# Allegro board avrusb500.brd
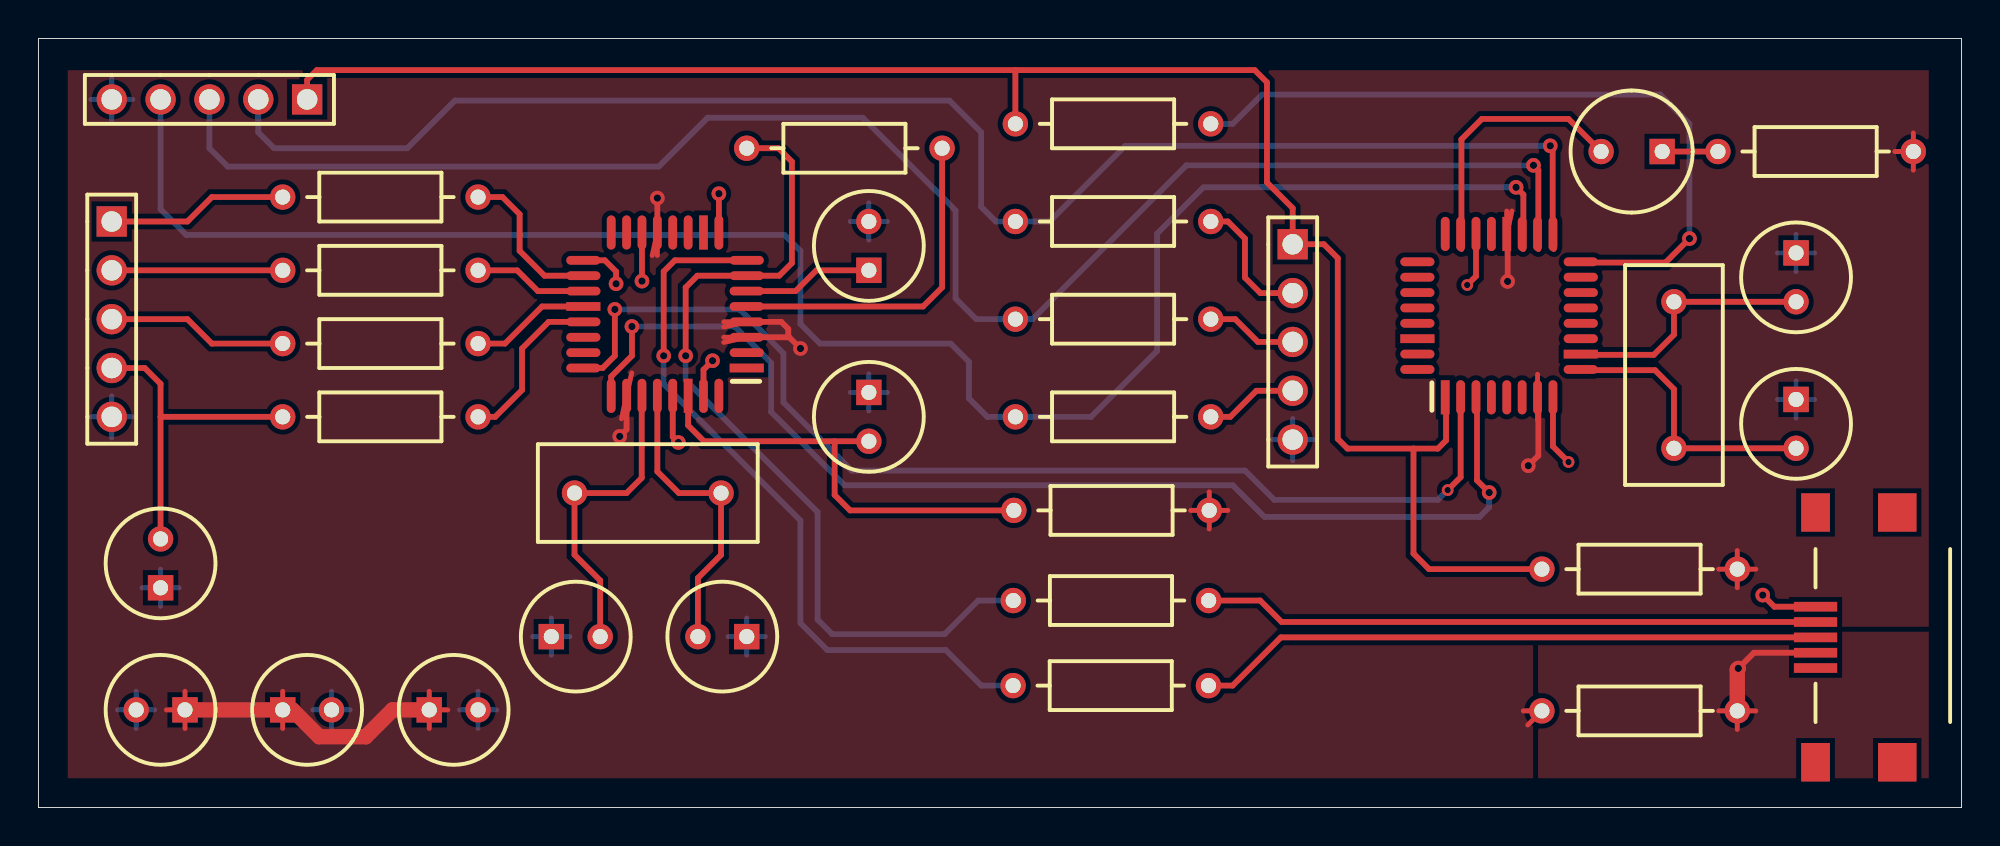
[diagram p0: board, top side]
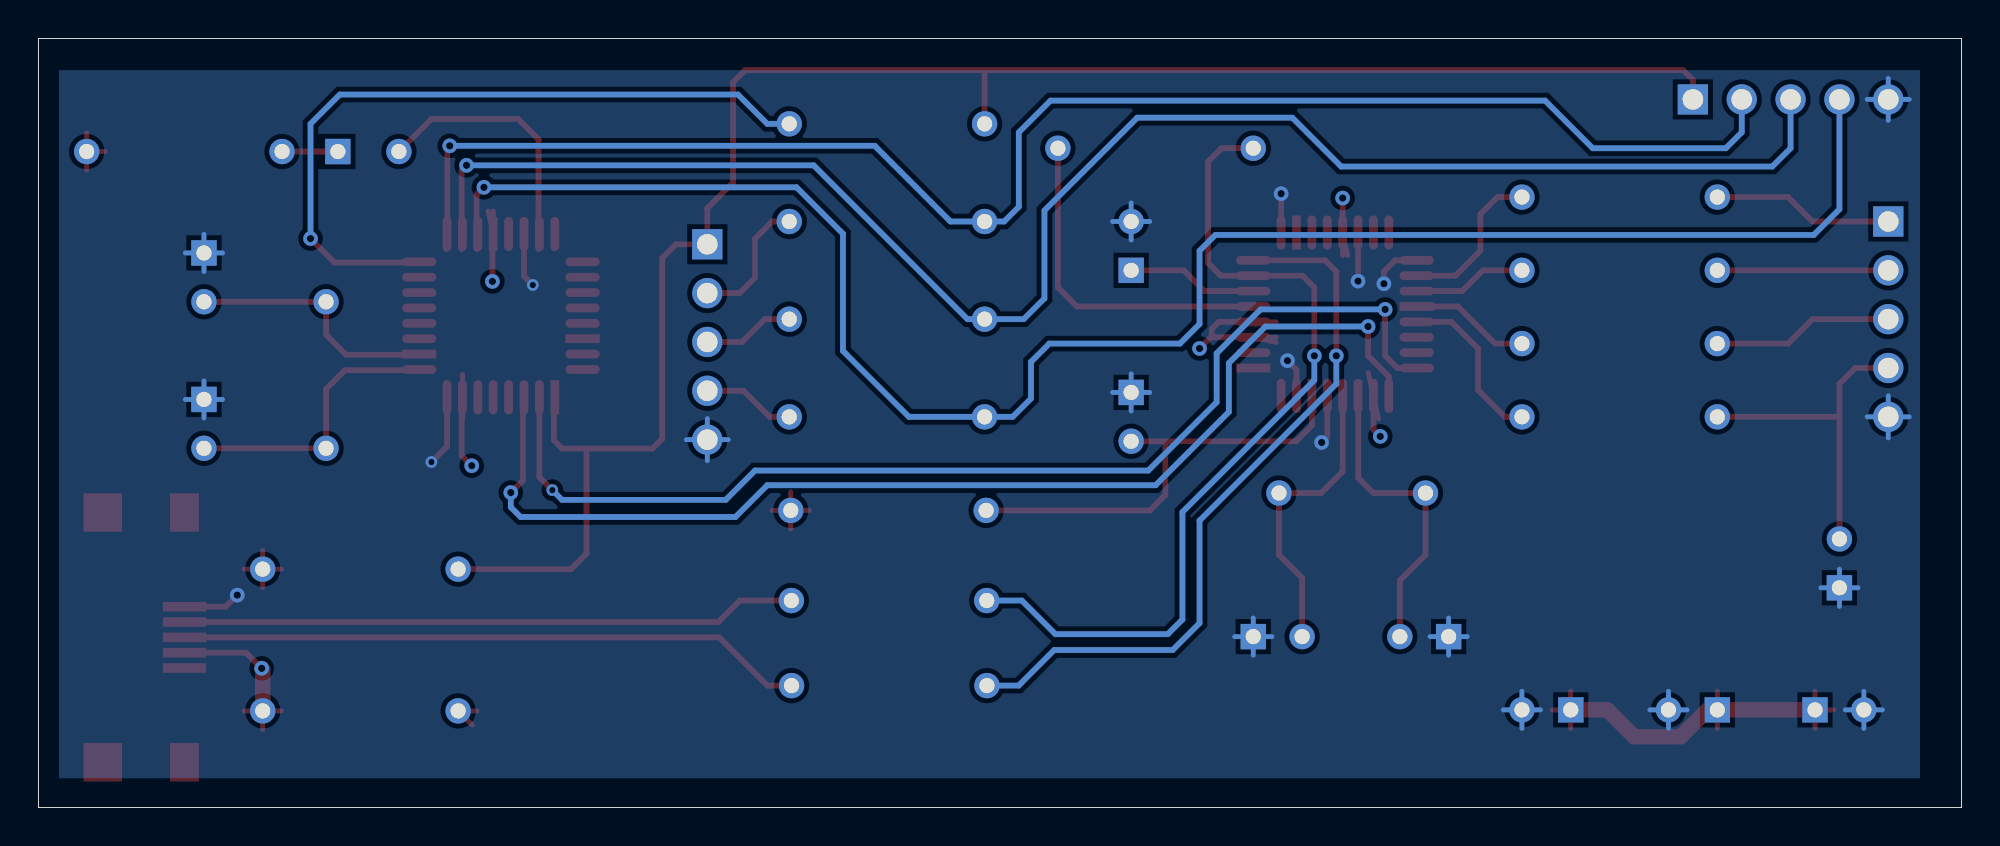
[diagram p1: board, bottom side, seen from below]

Outline 100 x 40 mm; copper layers: TOP, GND, POWER, BOTTOM. Coordinates in mm from the lower left corner of the outline.
Outline path: 0,40 0,0 100,0 100,40 0,40

## Design rules (mm)
net group NO_TYPE: nets +5V BMISO BMOSI BRESET BSCK D+ D- F_MISO F_MOSI F_SCK GND MISO MOSI N02483 N02615 N03527 N06839 N06967 N07033 N07247 N11951 N15182 N15289 N19734 N20572 N22544 N41098 N41106 N49165 RESET RXD SCK TXD VCC

## Placement (name value [footprint] x y rotation side)
C1  47nF  [CPCYL1D225LS100031]  43.18 21.59 270 top
C2  27pF  [CPCYL1D225LS100031]  36.83 8.89 180 top
C3  27pF  [CPCYL1D225LS100031]  26.67 8.89 0 top
C4  47nF  [CPCYL1D225LS100031]  43.18 27.94 90 top
C5  100nF  [CPCYL1D225LS100031]  12.7 5.08 0 top
C6  1uF  [CPCYL1D225LS100031]  7.62 5.08 180 top
C7  100nF  [CPCYL1D225LS100031]  91.39 21.23 270 top
C8  100nF  [CPCYL1D225LS100031]  91.39 28.84 270 top
C9  100nF  [CPCYL1D225LS100031]  20.32 5.08 0 top
C10  22nF  [CPCYL1D225LS100031]  6.35 11.43 90 top
D1  LED  [CYLD250LS125031]  84.43 34.12 180 top
IC1  ATmega8  [QUAD80M32WG900]  73.15 21.34 0 top
J1  bbpg_Bitbang  [BLKCON100VHTM1SQSW1005]  3.81 30.48 270 top
J2  USBA  [USBMINIB]  92.41 10.45 270 top
J3  avrusb500_out  [BLKCON100VHTM1SQSW1005]  65.22 29.3 270 top
J4  firmware_in  [BLKCON100VHTM1SQSW1005]  13.97 36.83 180 top
R1  470  [AX400X100031]  50.72 15.45 0 top
R2  220  [AX400X100031]  22.86 20.32 180 top
R3  220  [AX400X100031]  22.86 24.13 180 top
R4  220  [AX400X100031]  22.86 27.94 180 top
R5  27  [AX400X100031]  60.84 6.34 180 top
R6  27  [AX400X100031]  60.85 10.77 180 top
R7  1.5k  [AX400X100031]  36.83 34.29 0 top
R8  2.2  [AX400X100031]  88.34 5.03 180 top
R9  10k  [AX400X100031]  88.34 12.4 180 top
R10  470  [AX400X100031]  87.33 34.12 0 top
R11  1k  [AX400X100031]  50.8 20.32 0 top
R12  220  [AX400X100031]  50.8 25.4 0 top
R13  1k  [AX400X100031]  50.8 30.48 0 top
R14  220  [AX400X100031]  22.86 31.75 180 top
R15  220  [AX400X100031]  60.96 35.56 180 top
U1  FT232BM  [QUAD80M32WG900]  36.83 22.86 90 top
Y1  3.6864Mhz  [RAD450X200LS300031]  85.05 26.3 270 top
Y2  6Mhz  [RAD450X200LS300031]  35.49 16.36 180 top

## Library data of the parts
C1-C5 C7-C10 = CAPACITOR NON-POL: alternate symbols: (SMDCAP)
C6 = CAPACITOR POL: alternate symbols: (SMDCAP)
D1 = LED
IC1 = ATmega8-DIL28_1
J1 J3 J4 = CON5
J2 = CON4_6
R1-R15 = R: alternate symbols: (SMDRES)
U1 = FT232BM_2: alternate symbols: (JEDECMS026)
Y1 Y2 = ZTA

## Footprints (pads in the part's own frame, mm; a bottom-side part is the same pattern mirrored in y, then rotated)
AX400X100031
  round 1.321 hole 0.787: 1(0,0) 2(10.16,0)
BLKCON100VHTM1SQSW1005
  rect 1.575x1.575 hole 1.067: 1(0,0)
  round 1.575 hole 1.067: 2(2.54,0) 3(5.08,0) 4(7.62,0) 5(10.16,0)
CPCYL1D225LS100031
  rect 1.321x1.321 hole 0.787: 1(0,0)
  round 1.321 hole 0.787: 2(2.54,0)
CYLD250LS125031
  rect 1.321x1.321 hole 0.787: 1(0,0)
  round 1.321 hole 0.787: 2(3.175,0)
QUAD80M32WG900
  rect 0.457x1.778 smd: 1(0,0) 20(3.2,8.496)
  oval 0.457x1.778 smd: 2(0.8,0) 3(1.6,0) 4(2.4,0) 5(3.2,0) 6(4,0) 7(4.801,0) 8(5.601,0) 17(5.601,8.496) 18(4.801,8.496) 19(4,8.496) 21(2.4,8.496) 22(1.6,8.496) 23(0.8,8.496) 24(0,8.496)
  oval 1.778x0.457 smd: 9(7.048,1.448) 11(7.048,3.048) 12(7.048,3.848) 13(7.048,4.648) 14(7.048,5.448) 15(7.048,6.248) 16(7.048,7.048) 25(-1.448,7.048) 26(-1.448,6.248) 27(-1.448,5.448) 28(-1.448,4.648) 29(-1.448,3.848) 31(-1.448,2.248) 32(-1.448,1.448)
  rect 1.778x0.457 smd: 10(7.048,2.248) 30(-1.448,3.048)
RAD450X200LS300031
  round 1.321 hole 0.787: 1(0,0) 2(7.62,0)
USBMINIB
  rect 0.5x2.25 smd: 1(0,0) 2(0.798,0) 3(1.595,0) 4(2.393,0) 5(3.19,0)
  rect 2x1.5 smd: SHIELD1(-4.9,0) SHIELD2(8.09,0)
  rect 2x2 smd: SHIELD3(-4.9,4.25) SHIELD4(8.09,4.25)

## Nets
+5V: J2.4 R8.1
GND: C1.1 C2.1 C3.1 C4.2 C5.2 C6.2 C7.1 C8.1 C9.2 C10.1 IC1.8(GND) IC1.22(AGND) J1.5 J2.1 J3.5 J4.5 U1.9(GND) U1.14(PWRCTL) U1.17(GND1) U1.29(AGND) U1.31(TEST)
VCC: C5.1 C6.1 C9.1 IC1.7(VCC) IC1.20(AVCC) R1.2 R8.2 R9.1 R10.2 U1.3(VCC) U1.4(RESET#) U1.13(VCC-IO) U1.26(VCC1)
BMISO: J1.3 R3.2
BMOSI: J1.2 R4.2
BRESET: J1.1 R14.2
BSCK: C10.2 J1.4 R2.2
D+: J2.2 R6.1
D-: J2.3 R5.1
F_MISO: IC1.18((MISO) PB4) J4.3 R12.1
F_MOSI: IC1.17((OC2/MOSI) PB3) J4.2 R13.1
F_SCK: IC1.19((SCK) PB5) J4.4 R11.1
MISO: J3.3 R12.2
MOSI: J3.2 R13.2
RESET: IC1.1(PC6 (R\E\S\E\T\)) J3.1 J4.1 R9.2 R15.2
RXD: IC1.2(PD0 (RXD)) U1.24(RXD)
SCK: J3.4 R11.2
TXD: IC1.3(PD1 (TXD)) U1.25(TXD)
N02483: R6.2 R7.1 U1.7(USBDP)
N02615: R5.2 U1.8(USBDM)
N03527: C4.1 U1.6(3V3OUT)
N06839: R2.1 U1.21(DTR#)
N06967: R3.1 U1.20(DSR#)
N07033: R4.1 U1.19(DCD#)
N07247: R14.1 U1.18(RI#)
N11951: R7.2 U1.5(RSTOUT#)
N15182: C7.2 IC1.9(PB6 (XT1/TOSC1)) Y1.2
N15289: C8.2 IC1.10(PB7 (XT2/TOSC2)) Y1.1
N19734: D1.2(CATHODE) IC1.23((ADC0) PC0)
N20572: D1.1(ANODE) R10.1
N22544: IC1.16((SS/OC1B) PB2) R15.1
N41098: C3.2 U1.27(XTIN) Y2.2
N41106: C2.2 U1.28(XTOUT) Y2.1
N49165: C1.2 R1.1 U1.30(AVCC)

Pads without a net: IC1 4 5 6 11 12 13 14 15 21 24 25 26 27 28 29 30 31 32; J2 5 SHIELD1 SHIELD2 SHIELD3 SHIELD4; U1 1 2 10 11 12 15 16 22 23 32

## Via types
v1: diameter 0.762, hole 0.381, TOP to BOTTOM, 21 vias
v2: diameter 0.61, hole 0.33, TOP to BOTTOM, 3 vias

## Routing (per net, layer and track width the routed paths; a pad name or vN(x,y) marks a point on that pad's centre or on a via; arc(x,y) is an arc through that point)
+5V: length 9.5
  TOP w0.254: 88.34,4.06 R8.1 ; R8.1 87.37,5.03 ; R8.1 89.3,5.03
  TOP w0.3: v1(88.39,7.24) 89.21,8.05 J2.4
  TOP w0.8: v1(88.39,7.24) 88.34,7.18 R8.1
GND: length 73
  TOP w0.3: U1.17 29.45,28.46 30.04,27.88 v1(30.04,27.24) ; U1.29 32.98,19.28 v1(33.27,18.99) ; IC1.8 78.75,18.78 v2(79.56,17.97) ; v1(89.66,11.05) 90.27,10.45 J2.1 ; v1(35.05,23.24) 34.58,22.77 U1.31 ; IC1.22 74.75,27.64 v2(74.3,27.18) ; v1(35.38,31.93) U1.9 ; U1.14 v1(31.38,27.38)
  BOTTOM w0.254: 21.89,5.08 C9.2 ; C9.2 22.86,4.11 ; C9.2 23.83,5.08 ; C9.2 22.86,6.05 ; 25.7,8.89 C3.1 ; C3.1 26.67,7.92 ; C3.1 26.67,9.86 ; C3.1 27.64,8.89 ; C1.1 44.15,21.59 ; C1.1 43.18,20.62 ; C1.1 43.18,22.56 ; C1.1 42.21,21.59 ; 90.43,21.23 C7.1 ; C7.1 92.36,21.23 ; C7.1 91.39,22.19 ; C7.1 91.39,20.26 ; 2.72,20.32 J1.5 ; J1.5 4.9,20.32 ; J1.5 3.81,21.41 ; J1.5 3.81,19.23 ; 3.81,35.74 J4.5 ; J4.5 2.72,36.83 ; J4.5 4.9,36.83 ; J4.5 3.81,37.92 ; 42.21,30.48 C4.2 ; C4.2 43.18,31.45 ; C4.2 44.15,30.48 ; C4.2 43.18,29.51 ; C6.2 5.08,6.05 ; C6.2 6.05,5.08 ; C6.2 5.08,4.11 ; C6.2 4.11,5.08 ; 36.83,7.92 C2.1 ; C2.1 36.83,9.86 ; C2.1 37.8,8.89 ; C2.1 35.86,8.89 ; C10.1 7.32,11.43 ; C10.1 6.35,12.4 ; C10.1 5.38,11.43 ; C10.1 6.35,10.46 ; C8.1 91.39,29.81 ; C8.1 92.36,28.84 ; C8.1 91.39,27.88 ; C8.1 90.43,28.84 ; C5.2 15.24,6.05 ; C5.2 14.27,5.08 ; C5.2 16.21,5.08 ; C5.2 15.24,4.11 ; J3.5 65.22,20.23 ; J3.5 64.13,19.14 ; J3.5 66.31,19.14 ; J3.5 65.22,18.04
VCC: length 64
  TOP w0.254: 35.64,24.46 U1.3 35.64,24.19 ; 7.62,4.11 C6.1 ; C6.1 7.62,6.05 ; C6.1 6.65,5.08 ; 77.21,5.03 R8.2 77.44,4.29 ; 88.34,11.43 R9.1 ; R9.1 89.3,12.4 ; R9.1 88.34,13.37 ; R9.1 87.37,12.4 ; 30.85,22.61 U1.26 30.32,20.22 ; 59.91,15.45 R1.2 ; R1.2 60.88,16.42 ; R1.2 61.85,15.45 ; R1.2 60.88,14.49 ; 31.91,28.71 U1.13 32.18,28.71 ; 76.62,31.03 IC1.20 76.35,31.03 ; 77.95,22.53 IC1.7 77.95,20.14 ; C9.1 20.32,6.05 ; C9.1 20.32,4.11 ; C9.1 21.29,5.08 ; 35.64,25.26 U1.4 35.64,24.99 ; R10.2 97.49,35.09 ; R10.2 96.53,34.12 ; R10.2 97.49,33.15 ; 12.7,6.05 C5.1 12.7,4.11
  TOP w0.3: IC1.7 78,21.29 78,18.3 v1(77.47,17.78) ; v1(32.18,31.7) U1.13 ; 38.94,24.46 38.99,24.51 38.99,24.89 38.62,25.26 U1.4 ; 38.94,24.46 U1.3 ; 38.94,24.46 39.04,24.46 v1(39.62,23.88) ; 76.39,29.05 v1(76.39,27.36) ; U1.26 30.58,19.66 v1(30.23,19.3)
  TOP w0.8: C9.1 18.41,5.08 17.02,3.68 14.61,3.68 13.21,5.08 C5.1 C6.1
BMISO: length 9.4
  TOP w0.3: R3.2 9.02,24.13 7.75,25.4 J1.3
BMOSI: length 8.9
  TOP w0.3: R4.2 J1.2
BRESET: length 9.4
  TOP w0.3: R14.2 9.02,31.75 7.75,30.48 J1.1
BSCK: length 17.3
  TOP w0.3: 6.35,20.32 R2.2 ; 6.35,20.32 C10.2 ; 6.35,20.32 6.35,22.04 5.53,22.86 J1.4
D+: length 32
  TOP w0.3: J2.2 92.4,9.65 64.64,9.65 63.53,10.77 R6.1
D-: length 32.6
  TOP w0.3: R5.1 62.09,6.34 64.6,8.85 J2.3
F_MISO: length 87.6
  TOP w0.3: v1(77.74,33.4) 78,33.15 78,29.05
  BOTTOM w0.3: v1(77.74,33.4) 59.69,33.4 51.69,25.4 R12.1 48.77,25.4 47.69,26.48 47.69,31.05 42.86,35.88 34.8,35.88 32.26,33.34 9.84,33.34 8.89,34.29 J4.3
F_MOSI: length 82.2
  TOP w0.3: v1(78.61,34.42) 78.74,34.29 78.74,29.1 78.8,29.05
  BOTTOM w0.3: J4.2 11.43,35.12 12.26,34.29 19.18,34.29 21.65,36.77 47.37,36.77 49.02,35.12 49.02,31.24 49.78,30.48 R13.1 52.58,30.48 56.52,34.42 v1(78.61,34.42)
F_SCK: length 95.9
  TOP w0.3: v1(76.83,32.26) 77.22,31.88 77.22,29.07 77.19,29.05
  BOTTOM w0.3: v1(76.83,32.26) 60.58,32.26 58.17,29.84 58.17,23.75 54.74,20.32 R11.1 49.34,20.32 48.39,21.27 48.39,23.18 47.44,24.13 40.64,24.13 39.62,25.15 39.62,28.96 38.8,29.78 7.68,29.78 6.35,31.11 J4.4
MISO: length 4.8
  TOP w0.3: J3.3 63.41,24.22 62.23,25.4 R12.2
MOSI: length 7
  TOP w0.3: J3.2 63.54,26.76 62.74,27.56 62.74,29.59 61.85,30.48 R13.2
RESET: length 96.7
  TOP w0.3: J4.1 13.97,37.85 14.48,38.35 50.8,38.35 ; 73.19,22.05 73.19,19.09 72.77,18.67 71.5,18.67 ; R9.2 72.31,12.4 71.5,13.21 71.5,18.67 ; 71.5,18.67 68.07,18.67 67.56,19.18 67.56,28.57 66.84,29.3 J3.1 65.22,31.17 63.88,32.51 63.88,37.72 63.25,38.35 50.8,38.35 ; 50.8,38.35 R15.2
RXD: length 58.5
  TOP w0.3: v2(73.28,16.51) 73.95,17.18 IC1.2 ; v1(29.97,25.91) 29.97,23.5 29.34,22.86 U1.24
  BOTTOM w0.3: v2(73.28,16.51) 72.77,16 64.26,16 62.74,17.53 42.29,17.53 38.73,21.08 38.73,23.62 36.45,25.91 v1(29.97,25.91)
SCK: length 4.8
  TOP w0.3: J3.4 63.33,21.68 61.98,20.32 R11.2
TXD: length 61.1
  TOP w0.3: U1.25 29.78,22.42 30.86,23.5 v1(30.86,25.02) ; 74.8,22.05 74.8,22.04 74.8,17.02 v1(75.44,16.38)
  BOTTOM w0.3: v1(75.44,16.38) 75.44,15.62 74.93,15.11 63.75,15.11 62.1,16.76 41.91,16.76 38.1,20.57 38.1,23.11 36.2,25.02 v1(30.86,25.02)
N02483: length 45.3
  TOP w0.3: R7.1 38.48,34.29 39.18,33.59 39.18,28.32 38.52,27.66 U1.7 34.27,27.66 33.66,27.05 v1(33.66,23.5)
  BOTTOM w0.3: v1(33.66,23.5) 33.66,22.23 40.51,15.37 40.51,9.78 41.27,9.02 47.12,9.02 48.87,10.77 R6.2
N02615: length 38.2
  TOP w0.3: U1.8 33.1,28.46 32.51,27.88 v1(32.51,23.5)
  BOTTOM w0.3: R5.2 49.03,6.34 47.18,8.19 41.02,8.19 39.62,9.59 39.62,14.92 32.51,22.04 v1(32.51,23.5)
N03527: length 6.8
  TOP w0.3: U1.6 39.37,26.86 40.45,27.94 C4.1
N06839: length 8.8
  TOP w0.3: U1.21 26.53,25.26 25.15,23.88 25.15,21.72 23.75,20.32 R2.1
N06967: length 6.3
  TOP w0.3: U1.20 26.19,26.06 24.26,24.13 R3.1
N07033: length 5.9
  TOP w0.3: R4.1 24.89,27.94 25.97,26.86 U1.19
N07247: length 8.3
  TOP w0.3: R14.1 24.13,31.75 25.02,30.86 25.02,28.96 26.31,27.66 U1.18
N11951: length 17.8
  TOP w0.3: U1.5 46,26.06 46.99,27.05 R7.2
N15182: length 15.4
  TOP w0.3: 91.39,18.68 Y1.2 85.05,21.76 84.06,22.75 79.5,22.75
N15289: length 14
  TOP w0.3: C8.2 Y1.1 85.05,24.59 84,23.55 79.5,23.55
N19734: length 14.1
  TOP w0.3: D1.2 79.56,35.81 75.06,35.81 74,34.75 74,29.05
N20572: length 2.9
  TOP w0.3: R10.1 D1.1
N22544: length 39
  TOP w0.3: 79.5,28.35 84.61,28.35 v1(85.85,29.59)
  BOTTOM w0.3: v1(85.85,29.59) 85.85,35.56 84.33,37.08 63.63,37.08 62.1,35.56 R15.1
N41098: length 16.1
  TOP w0.3: C3.2 29.21,11.81 27.88,13.15 27.88,16.36 30.58,16.36 31.37,17.14 31.37,21.4 U1.27
N41106: length 15.7
  TOP w0.3: C2.2 34.29,11.94 35.49,13.14 Y2.1 33.3,16.36 32.18,17.48 U1.28
N49165: length 23.7
  TOP w0.3: R1.1 42.2,15.45 41.4,16.26 41.4,19.05 ; C1.2 41.4,19.05 ; 41.4,19.05 34.61,19.05 33.78,19.88 U1.30

## Copper pours and planes (outline as drawn; the poured copper is in the pictures)
+5V on TOP: 77.98,1.52 98.3,1.52 98.3,9.14 77.98,9.14
+5V on POWER: 80.01,1.52 98.3,1.52 98.3,9.14 80.01,9.14
GND on BOTTOM: 98.93,1.52 2.16,1.52 2.16,38.35 98.93,38.35
GND on GND: 0,0 100,0 100,40 0,40
VCC on TOP: 98.3,1.52 1.52,1.52 1.52,38.35 98.3,38.35
VCC on POWER: 0,0 100,0 100,40 0,40
